# EAGLE board Domofon-oryginal (EAGLE 7.6.0)

Size 73.58 x 101.49 mm. Coordinates in mm from the lower left corner, seen from the top.
Outline: 0,0 56.82,0 56.82,53.33 0,53.33 0,0
Copper layers (1*16): Top 0.035mm / dielectric 1.5mm / Bottom 0.035mm
Design rules "default": minimum track width 10mil, minimum drill 24mil, track to track 8mil, track to pad 8mil, pad to pad 8mil, via to via 8mil, smd to smd 8mil, copper to edge 40mil, drill to drill 8mil, minimum pad ring 10mil, minimum via ring 8mil, stop-mask expansion 4mil, vias tented up to drill 0mil, thermal gap 10mil

## Footprints (pad centres in the part's own frame; a part is rotated, then mirrored left to right if it is on the bottom)
LED5MM = drill 0.813 octagon: A -1.27,0; K 1.27,0
1X8P-2.54-2.54-11.6-3.0-BLACK-MALE = drill 0.889 pad 1.651 square: 1 0,8.89 | drill 0.889 pad 1.651: 2 0,6.35; 3 0,3.81; 4 0,1.27; 5 0,-1.27; 6 0,-3.81; 7 0,-6.35; 8 0,-8.89
PIEZO-22MM = drill 1 pad 2.54: P$1 -5,0; P$2 5,0
0207/10 = drill 0.813 octagon: 1 -5.08,0; 2 5.08,0
TL1105 = drill 1 pad 1.676: 1 -2.25,3.25; 2 2.25,3.25; 3 -2.25,-3.25; 4 2.25,-3.25
1X3P-2.54-2.54-11.6-3.0-BLACK-MALE = drill 0.889 pad 1.651 square: 1 0,2.54 | drill 0.889 pad 1.651: 2 0,0; 3 0,-2.54
1X16P-2.54-2.54-11.6-3.0-BLACK-MALE = drill 0.889 pad 1.651 square: 1 0,19.05 | drill 0.889 pad 1.651: 2 0,16.51; 3 0,13.97; 4 0,11.43; 5 0,8.89; 6 0,6.35; 7 0,3.81; 8 0,1.27; 9 0,-1.27; 10 0,-3.81; 11 0,-6.35; 12 0,-8.89; 13 0,-11.43; 14 0,-13.97; 15 0,-16.51; 16 0,-19.05
ARDUINO_UNO = drill 1.016 pad 1.88: 0 63.5,50.8; 1 60.96,50.8; 2 58.42,50.8; 3 55.88,50.8; 3.3V 35.56,2.54; 4 53.34,50.8; 5 50.8,50.8; 5V 38.1,2.54; 6 48.26,50.8; 7 45.72,50.8; 8 41.656,50.8; 9 39.116,50.8; 10 36.576,50.8; 11 34.036,50.8; 12 31.496,50.8; 13 28.956,50.8; A0 50.8,2.54; A1 53.34,2.54; A2 55.88,2.54; A3 58.42,2.54; A4 60.96,2.54; A5 63.5,2.54; AREF 23.876,50.8; GND 26.416,50.8; GND. 43.18,2.54; GND.. 40.64,2.54; I/OREF 30.48,2.54; N/C 27.94,2.54; RESET 33.02,2.54; SCL 18.796,50.8; SDA 21.336,50.8; VIN 45.72,2.54 | hole 3.2: 66.04,7.62; 66.04,35.56; 15.24,50.8; 13.97,2.54

## Placement (x,y rotation side)
D1  [LED5MM]  5,187.88 0 top  (outside the outline)
D2  [LED5MM]  5,175.18 0 top  (outside the outline)
D3  [LED5MM]  5,200.58 0 top  (outside the outline)
D4  [LED5MM]  5,213.28 0 top  (outside the outline)
D6  [LED5MM]  5,391.08 0 top  (outside the outline)
KEYPAD1  [1X8P-2.54-2.54-11.6-3.0-BLACK-MALE]  5,10.08 0 top
PIEZO1  [PIEZO-22MM]  5,60.88 0 top
PIEZO2  [PIEZO-22MM]  5,73.58 0 top
PIEZO3  [PIEZO-22MM]  5,86.28 0 top
PIEZO4  [PIEZO-22MM]  5,98.98 0 top
R1  1k‎Ω  [0207/10]  5,225.98 0 top  (outside the outline)
R2  1k‎Ω  [0207/10]  5,238.68 0 top  (outside the outline)
R3  1k‎Ω  [0207/10]  5,251.38 0 top  (outside the outline)
R4  1k‎Ω  [0207/10]  5,264.08 0 top  (outside the outline)
R5  1k‎Ω  [0207/10]  5,276.78 0 top  (outside the outline)
R6  1k‎Ω  [0207/10]  5,289.48 0 top  (outside the outline)
R7  1k‎Ω  [0207/10]  5,302.18 0 top  (outside the outline)
R8  1k‎Ω  [0207/10]  5,314.88 0 top  (outside the outline)
R9  1k‎Ω  [0207/10]  5,327.58 0 top  (outside the outline)
R10  1k‎Ω  [0207/10]  5,340.28 0 top  (outside the outline)
R11  1k‎Ω  [0207/10]  5,352.98 0 top  (outside the outline)
R12  1k‎Ω  [0207/10]  5,365.68 0 top  (outside the outline)
R13  1k‎Ω  [0207/10]  5,378.38 0 top  (outside the outline)
S1  [TL1105]  5,111.68 0 top  (outside the outline)
S2  [TL1105]  5,124.38 0 top  (outside the outline)
S3  [TL1105]  5,137.08 0 top  (outside the outline)
S4  [TL1105]  5,149.78 0 top  (outside the outline)
SERVO1  [1X3P-2.54-2.54-11.6-3.0-BLACK-MALE]  5,162.48 0 top  (outside the outline)
U1  [1X16P-2.54-2.54-11.6-3.0-BLACK-MALE]  5,22.78 0 top
UMaster  [ARDUINO_UNO]  5,35.48 0 top
USlave  [ARDUINO_UNO]  5,48.18 0 top

## Library data of the parts
D1-D4 D6 KEYPAD1 PIEZO1-PIEZO4 R1-R13 S1-S4 SERVO1 U1 UMaster USlave = AUTODESK_CIRCUITS_BREADBOARD

## Nets
N$1: PIEZO1.P$2 PIEZO2.P$2 PIEZO3.P$2 PIEZO4.P$2 R5.1 R6.1 R7.1 R8.1 R9.1 R10.1 R11.1 R12.1 USlave.GND..
N$2: PIEZO1.P$1 R1.2
N$3: PIEZO2.P$1 R2.2
N$4: R2.1 USlave.12
N$5: PIEZO3.P$1 R3.2
N$6: R3.1 USlave.11
N$7: PIEZO4.P$1 R4.2
N$8: R4.1 USlave.10
N$9: R8.2 S2.3
N$10: R12.2 S4.3
N$11: D2.K R7.2
N$12: R11.2 S3.3
N$13: D4.K R10.2
N$14: D3.K R9.2
N$15: S1.1 S2.1 S3.1 S4.1 UMaster.A0 USlave.5 USlave.6 USlave.7 USlave.8
N$16: D1.K R5.2
N$17: D4.A USlave.A3
N$18: D3.A USlave.A2
N$19: D2.A USlave.A1
N$20: D1.A USlave.A0
N$21: UMaster.A4 USlave.A4
N$22: UMaster.A5 USlave.A5
N$23: UMaster.GND. USlave.GND.
N$24: KEYPAD1.1 UMaster.7
N$25: KEYPAD1.2 UMaster.6
N$26: KEYPAD1.3 UMaster.5
N$27: KEYPAD1.4 UMaster.4
N$28: KEYPAD1.5 UMaster.3
N$29: KEYPAD1.6 UMaster.2
N$30: KEYPAD1.7 UMaster.1
N$31: KEYPAD1.8 UMaster.0
N$32: D6.K R13.2 SERVO1.1 U1.1 U1.3 U1.5 UMaster.GND..
N$33: R13.1 U1.16
N$34: SERVO1.2 U1.2 U1.15 UMaster.5V
N$35: U1.4 UMaster.13
N$36: U1.6 UMaster.12
N$37: U1.14 UMaster.8
N$38: U1.13 UMaster.9
N$39: U1.12 UMaster.10
N$40: U1.11 UMaster.11
N$41: R1.1 USlave.13
N$42: S1.4 S2.4 S3.4 S4.4 USlave.5V
N$43: R6.2 S1.3
N$44: D6.A UMaster.A1
N$45: SERVO1.3 UMaster.A3

## Tracks (layer width: path | path; a pad name or v marks a point on that pad's centre or on a via)
N$1  (12 unrouted)
N$2  (1 unrouted)
N$3  (1 unrouted)
N$4  (1 unrouted)
N$5  (1 unrouted)
N$6  (1 unrouted)
N$7  (1 unrouted)
N$8  (1 unrouted)
N$9  (1 unrouted)
N$10  (1 unrouted)
N$11  (1 unrouted)
N$12  (1 unrouted)
N$13  (1 unrouted)
N$14  (1 unrouted)
N$15  (8 unrouted)
N$16  (1 unrouted)
N$17  (1 unrouted)
N$18  (1 unrouted)
N$19  (1 unrouted)
N$20  (1 unrouted)
N$21  (1 unrouted)
N$22  (1 unrouted)
N$23  (1 unrouted)
N$24  (1 unrouted)
N$25  (1 unrouted)
N$26  (1 unrouted)
N$27  (1 unrouted)
N$28  (1 unrouted)
N$29  (1 unrouted)
N$30  (1 unrouted)
N$31  (1 unrouted)
N$32  (6 unrouted)
N$33  (1 unrouted)
N$34  (3 unrouted)
N$35  (1 unrouted)
N$36  (1 unrouted)
N$37  (1 unrouted)
N$38  (1 unrouted)
N$39  (1 unrouted)
N$40  (1 unrouted)
N$41  (1 unrouted)
N$42  (4 unrouted)
N$43  (1 unrouted)
N$44  (1 unrouted)
N$45  (1 unrouted)